# Altium PCB Controlled Rectifier.PcbDoc
Units mm, origin at the board's own origin, x right, y up, seen from the top; angles counter-clockwise.
Board outline 66.5 x 100.84 mm, 2 copper layers (Top Layer, Bottom Layer); 64 components, 39 nets, 239 pads, 0 vias.
Unrouted connection lines stored in the file: 2.
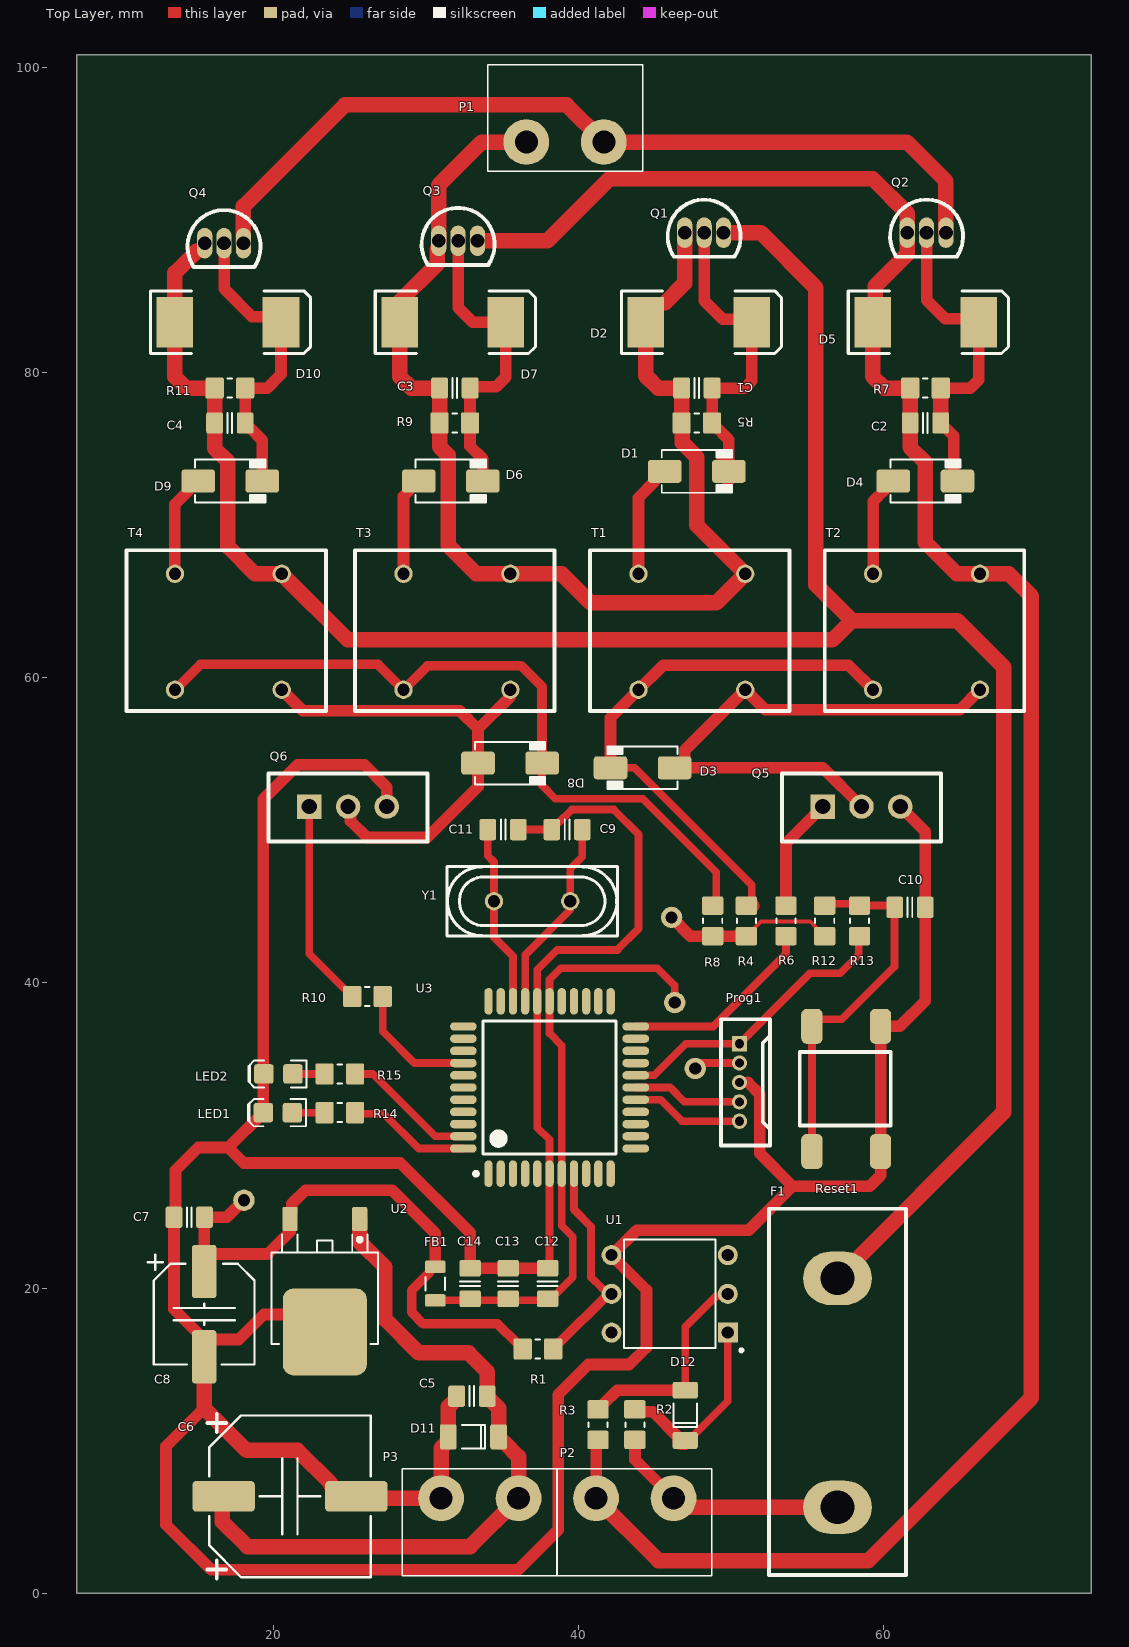
[diagram p0: Top Layer view]
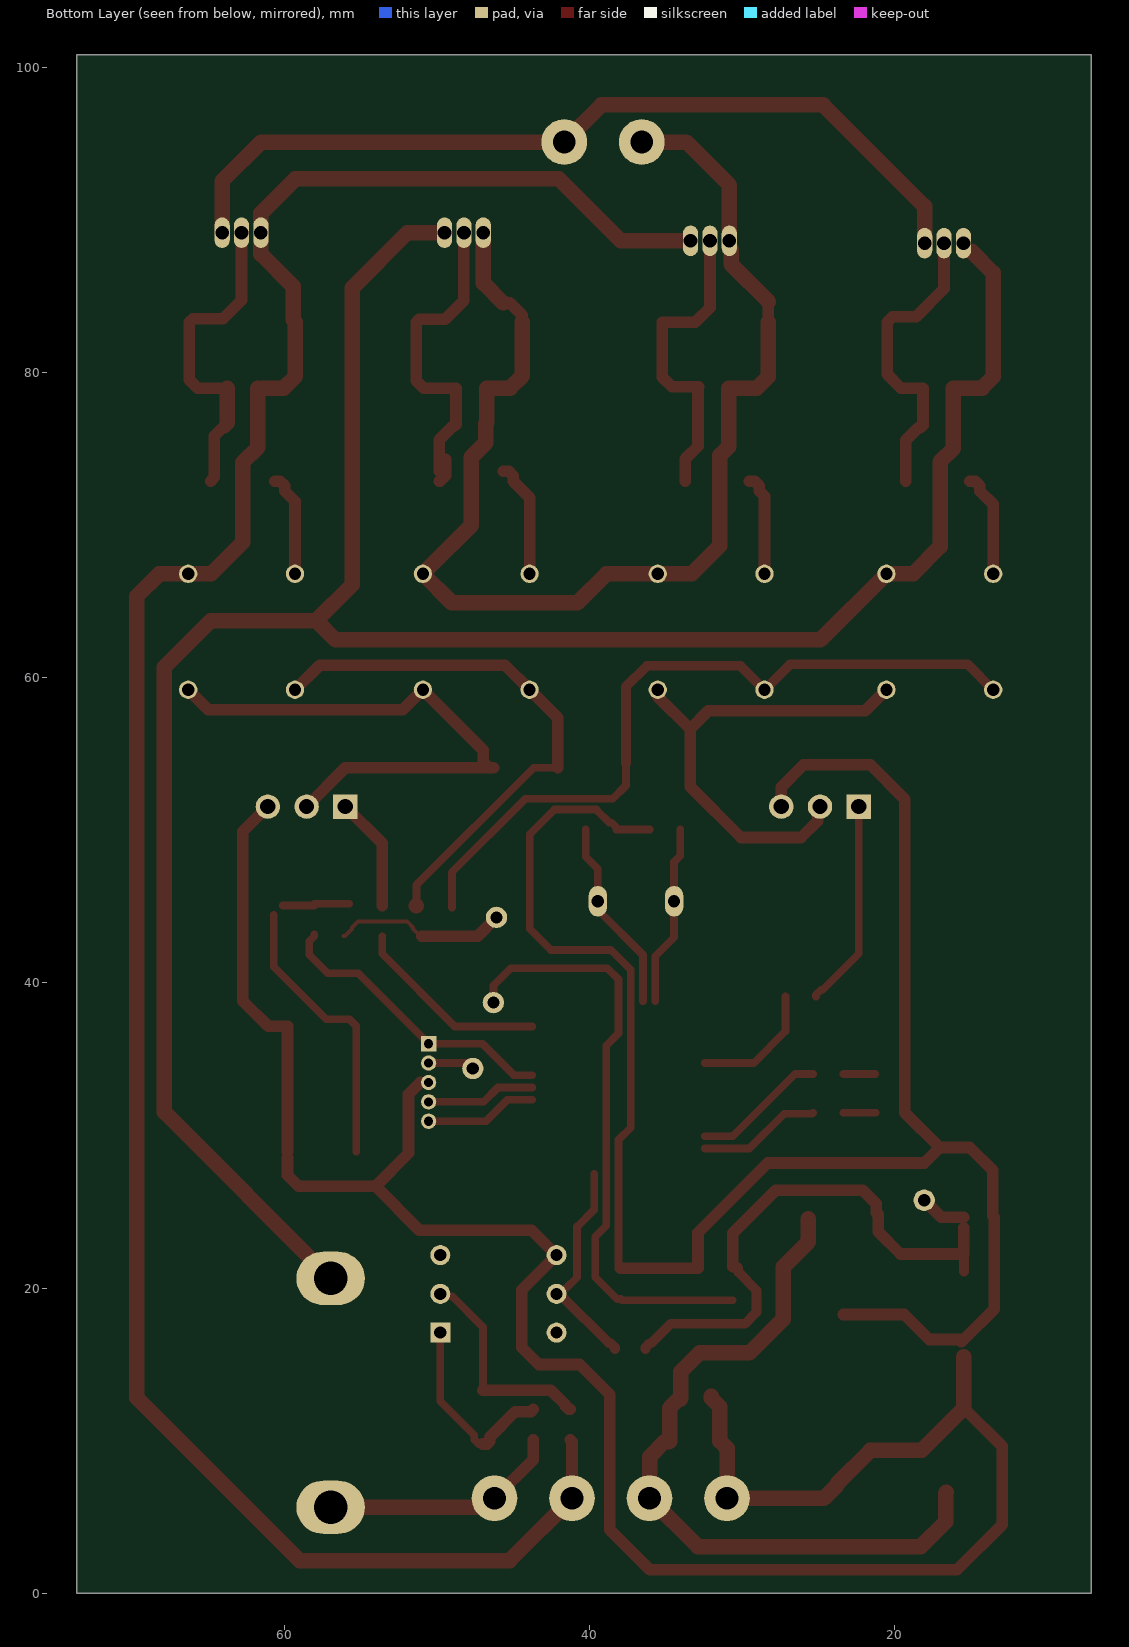
[diagram p1: Bottom Layer view, seen from below]
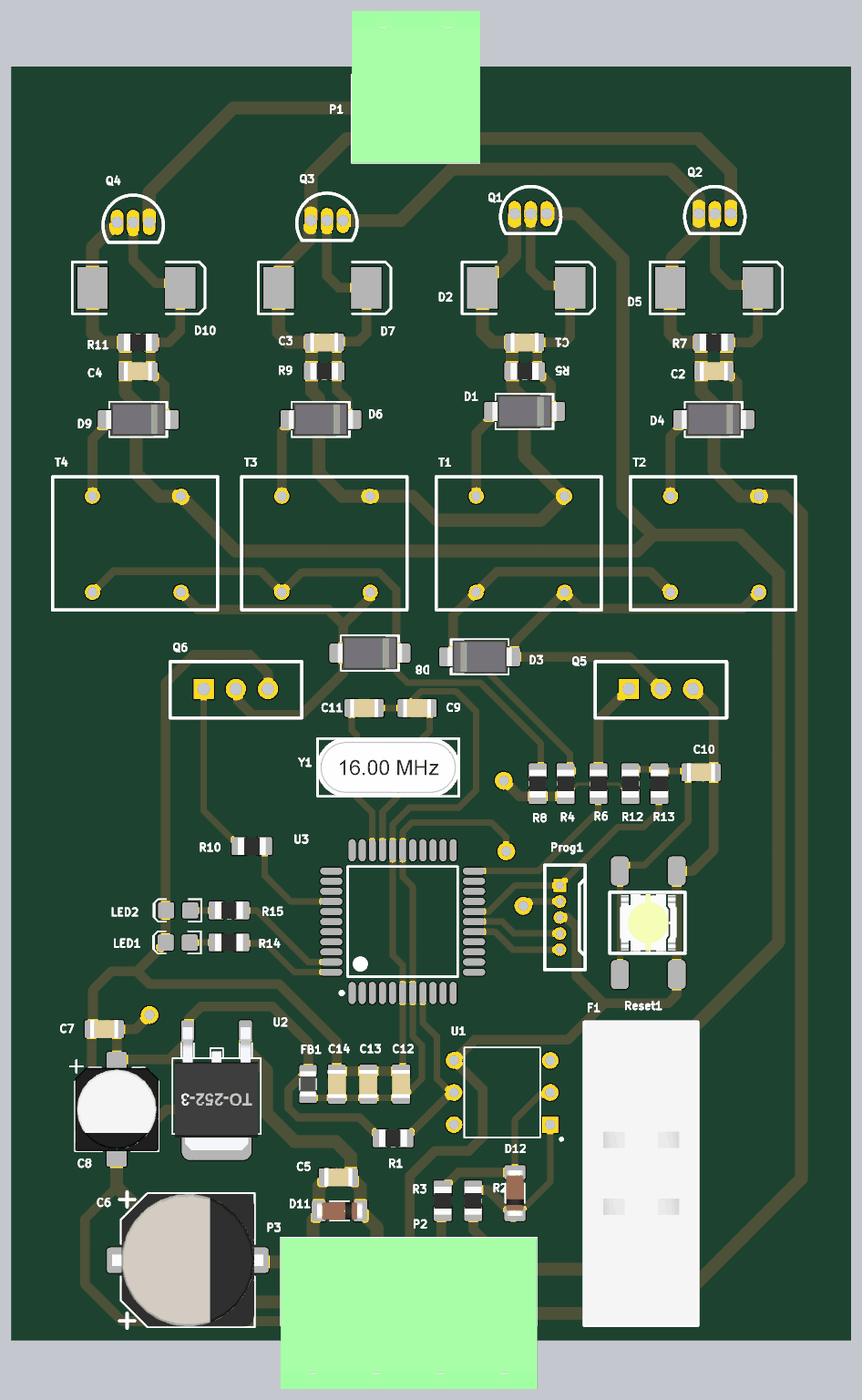
[diagram p2: 3D render of the assembled board from above, using the file's embedded part models]

## Layer stack, top to bottom
Top Solder: solder mask 0.0102, Solder Resist, Dk 3.5
Top Layer: signal copper 0.0356
Dielectric 1: dielectric 0.32, FR-4, Dk 4.8
Bottom Layer: signal copper 0.0356
Bottom Solder: solder mask 0.0102, Solder Resist, Dk 3.5

## Board outline
7.112,0 73.609,0 73.609,100.838 7.112,100.838

## Design rules (kind name [scope] priority, off if disabled: settings)
Clearance [All] p1: gap=0.2 ignorepadtopadclearanceinfootprint=FALSE
ComponentClearance [All] p1: gap=0.127 collisioncheckmode=3 verticalgap=0.127 showdistances=FALSE
HoleSize [All] p1: absolutevalues=TRUE maxlimit=2.54 minlimit=0.4 maxpercent=80.000 minpercent=20.000
PolygonConnect [All] p1: connectstyle=Relief reliefconductorwidth=0.254 reliefentries=4 polygonreliefangle="90 Angle" airgapwidth=0.254
RoutingVias [All] p1: holewidth=0.711 width=1.27 viastyle="Through Hole" minholewidth=0.711 minwidth=1.27 maxholewidth=0.711 maxwidth=1.27
SolderMaskExpansion [All] p1: expansion=0.102
UnRoutedNet [All] p1: checkbadconnections=TRUE
Width [All] p1: maxlimit=1.016 minlimit=0.254 preferedwidth=0.508
27 further rules are at their usual default settings.

## Classes and differential pairs
component class "controlled rectifier": C5 C6 C7 C8 C9 C10 C11 C12 C13 C14 D11 FB1 LED1 LED2 P3 Prog1 R12 R13 R14 R15 Reset1 U2 U3 Y1
component class "controlled rectifier2": C1 C2 C3 C4 D1 D2 D3 D4 D5 D6 D7 D8 D9 D10 D12 F1 P1 P2 Q1 Q2 Q3 Q4 Q5 Q6 R1 R2 R3 R4 R5 R6 R7 R8 R9 R10 R11 T1 T2 T3 T4 U1

## Components (designator, comment, footprint, x,y, rotation, side; value= is the part's Value field where it differs from the comment)
C1 "100nF" CAPS_0805 47.752,78.994 r0 top
C2 "100nF" CAPS_0805 62.738,76.708 r0 top
C3 "100nF" CAPS_0805 31.888,78.994 r0 top
C4 "100nF" CAPS_0805 17.145,76.708 r0 top
C5 "100nF" CAPS_0805 33.008,12.915 r0 top
C6 "100uF.50v" CAP_ELEC_SIZE_G 21.082,6.35 r270 top value=100pF
C7 "100nF" CAPS_0805 14.478,24.638 r0 top
C8 "100uF.16v" CAP_ELEC_6.3x4.2 15.461,18.288 r90 top value=100pF
C9 "22pF" CAPS_0805 39.243,50.053 r0 top value=0.1uF
C10 "100nF" CAPS_0805 61.722,44.958 r0 top
C11 "22pF" CAPS_0805 35.052,50.053 r180 top value=0.1uF
C12 "10uF" CAPS_0805 37.973,20.295 r270 top value=0.1uF
C13 "10nF" CAPS_0805 35.382,20.295 r270 top value=0.1uF
C14 "100nF" CAPS_0805 32.893,20.295 r270 top value=0.1uF
D1 "SS14" DO-214AC 47.752,73.533 r0 top
D2 "SMBJ8.0CA" SMC 47.879,83.312 r0 top
D3 "SS14" DO-214AC 44.196,54.102 r180 top
D4 "SS14" DO-214AC 62.738,72.898 r0 top
D5 "SMBJ8.0CA" SMC 62.755,83.312 r0 top
D6 "SS14" DO-214AC 31.623,72.898 r0 top
D7 "SMBJ8.0CA" SMC 31.75,83.312 r0 top
D8 "SS14" DO-214AC 35.509,54.407 r0 top
D9 "SS14" DO-214AC 17.169,72.898 r0 top
D10 "SMBJ8.0CA" SMC 17.018,83.312 r0 top
D11 "LL4148" "SOD80, LL-34" 33.108,10.248 r180 top
D12 "LL4148" "SOD80, LL-34" 46.99,11.659 r90 top
F1 "Fuse_5A" fuse-2 56.972,13.132 r90 top
FB1 "Ferrite Bead" FBC2012N 30.607,20.295 r270 top value=10mH
LED1 "LED_green" LED-0805-A 20.288,31.496 r180 top
LED2 "LED_blue" LED-0805-A 20.325,34.036 r180 top
P1 "Header 2" "Phoenix 2 Pin -RA" 39.218,93.193 r180 top
P2 "Header 2" "Phoenix 2 Pin -RA" 43.586,8.153 r0 top
P3 "Header 2" "Phoenix 2 Pin -RA" 33.426,8.153 r0 top
Prog1 "Header 5" "SH-5 Pin" 50.546,36.017 r270 top
Q1 "MAC97" BT169 49.505,89.179 r180 top
Q2 "SCR" BT169 64.084,89.179 r180 top
Q3 "SCR" BT169 33.376,88.646 r180 top
Q4 "SCR" BT169 18.034,88.494 r180 top
Q5 "BD139" BD139 56.007,51.562 r0 top
Q6 "BD139" BD139 22.352,51.562 r0 top
R1 "4.7K" res_0805 37.338,16.002 r180 top
R2 "4.7K" res_0805 43.688,11.049 r90 top
R3 "4.7K" res_0805 41.275,11.049 r90 top
R4 "4.7K" res_0805 50.998,44.069 r270 top
R5 "4.7K" res_0805 47.752,76.708 r0 top
R6 "4.7K" res_0805 53.594,44.069 r90 top
R7 "4.7K" res_0805 62.738,78.994 r0 top
R8 "4.7K" res_0805 48.793,44.069 r270 top
R9 "4.7K" res_0805 31.888,76.708 r0 top
R10 "4.7K" res_0805 26.162,39.116 r180 top
R11 "4.7K" res_0805 17.145,78.994 r0 top
R12 "4.7K" RES_0805 56.134,44.069 r90 top
R13 "470" RES_0805 58.42,44.069 r270 top
R14 "470" RES_0805 24.352,31.496 r180 top value=220
R15 "470" RES_0805 24.352,34.036 r180 top value=220
Reset1 "SW-PB-SMD" KFC-6X6X4.5-4P-SMD 57.547,33.058 r0 top
T1 "Pulse Transformator" "Pulse Trans_Small" 43.927,59.218 r0 top
T2 "Pulse Transformator" "Pulse Trans_Small" 59.309,59.218 r0 top
T3 "Pulse Transformator" "Pulse Trans_Small" 28.529,59.218 r0 top
T4 "Pulse Transformator" "Pulse Trans_Small" 13.543,59.218 r0 top
U1 "4N25" DIP762W50P254L712H400Q6N 45.974,19.62 r180 top
U2 "78M05" TO-252 23.368,20.828 r180 top
U3 "PIC16F1937-I/PT" TQFP-PT44_N 38.1,33.147 r90 top
Y1 "NTK-10.000-HC49USM" XTLT_2 36.957,45.354 r0 top

## Footprints (in the part's own frame and the unit in brackets; to place one, negate y for a bottom-side part, rotate by r counter-clockwise, add the part's x,y. Pads: shape width x height; smd on the part's side, far side on the other; paste and mask are expansions set on the pad)
BD139 [mm] "SOT-32"
  round 1.6 hole 1: 1(2.54,0) 3(5.08,0)
  rect 1.6x1.6 hole 1: 2(0,0)
  silkscreen extent -2.67,-2.29 7.75,2.16
BT169 [mm]
  oval 1x2 hole 0.9: 1(0,0) 2(1.27,0) 3(2.54,0)
  silkscreen extent -1.12,-2.16 3.66,1.57
CAP_ELEC_6.3x4.2 [mm] "Capacitor, polarized, aluminum can; 6.3x4.2mm DxH"
  round 0.508 on Mech15: 0(0,0)
  rrect25% 3.5x1.6 smd: 1(2.8,0) 2(-2.8,0)
  silkscreen extent -3.3,-3.3 3.9,3.7, body extent -3.3,-3.3 3.3,3.3, height 4.23
CAP_ELEC_SIZE_G [mm] "Capacitor, polarized, aluminum can; 10.0x10.2mm DxH"
  round 0.635 on Mech15: 0(0,0)
  rrect25% 2x4.1 smd: 1(0,-4.35) 2(0,4.35)
  silkscreen extent -5.4,-5.4 5.4,5.3, body extent -5.25,-6 5.25,6, height 10.5
CAPS_0805 [mm]
  round 0.254 on Mech15: 0(0,0)
  rrect25% 1.1x1.4 smd: 1(-1,0) 2(1,0)
  Top Layer pour cut-out: -0.675,0.7 -0.475,0.9 0.475,0.9 0.675,0.7 0.675,-0.7 0.475,-0.9 -0.475,-0.9 -0.675,-0.7
  silkscreen extent -0.15,-0.65 0.15,0.65, body extent -1.1,-0.72 1.1,0.73, height 1.34
DIP762W50P254L712H400Q6N [mm]
  rect 1.308x1.308 hole 0.8: 1(-3.81,2.54)
  round 1.308 hole 0.8: 2(-3.81,0) 3(-3.81,-2.54) 4(3.81,-2.54) 5(3.81,0) 6(3.81,2.54)
  silkscreen extent -4.8,-3.56 3,3.8
DO-214AC [mm]
  round 0.508 on Mech15: 0(0,0)
  rrect25% 2.2x1.5 smd: 1(-2.1,0) 2(2.1,0)
  silkscreen extent -2.3,-1.4 2.3,1.4, body extent -2.6,-1.3 2.6,1.3, height 2.42
FBC2012N [mm] "Ferrite Bead Chip, Body 2.0x1.2mm, 0805, IPC Medium Density"
  round 0.508 on Mech15: 0(0,0)
  rrect25% 0.8x1.35 smd: 1(-1.1,0) 2(1.1,0)
  silkscreen extent -0.43,-0.64 0.46,0.64, body extent -1,-0.62 1,0.63, height 0.9
fuse-2 [mm]
  oval 3.5x4.5 hole 2.2: 1(-7.5,0) 2(7.5,0)
  silkscreen extent -11.94,-4.5 12.06,4.5, body extent -11.9,-4.52 12.1,4.56, height 12.96
KFC-6X6X4.5-4P-SMD [mm]
  rrect50% 1.4x2.3 smd: 1(2.25,-4.1) 1(2.25,4.1) 2(-2.25,-4.1) 2(-2.25,4.1)
  silkscreen extent -3.05,-2.41 2.92,2.41, body extent -2.25,-2.25 2.25,2.25, height 0.55
LED-0805-A [mil]
  round 20 on Mech15: 0(0,0)
  rrect25% 50x50 smd: 1(-37.5,0) 2(37.5,0)
  Top Layer pour cut-out: -15,30 15,30 15,-30 -15,-30
  silkscreen extent -72,-35 77,35, body extent -39,-25 39,25, height 31
"Phoenix 2 Pin -RA" [mm]
  round 3 hole 1.5: 1(2.642,-1.93) 2(-2.438,-1.93)
  silkscreen extent -4.98,-7 5.16,0, body extent -5,-12.02 5.16,-0.02, height 8.6
"Pulse Trans_Small" [mm]
  round 1.2 hole 0.8: 1(0,0) 2(7,0) 3(0,7.6) 4(7,7.6)
  silkscreen extent -3.17,-1.4 9.91,9.14
res_0805 [mm]
  round 0.254 on Mech15: 0(0,0)
  rrect20% 1.2x1.4 smd: 1(-1,0) 2(1,0)
  Top Layer pour cut-out: -0.725,0.65 -0.525,0.85 0.525,0.85 0.725,0.65 0.725,-0.65 0.525,-0.85 -0.525,-0.85 -0.725,-0.65
  silkscreen extent -0.15,-0.62 0.15,0.62, body extent -1.1,-0.67 1.1,0.68, height 0.69
RES_0805 [mm]
  round 0.254 on Mech15: 0(0,0)
  rrect20% 1.2x1.4 smd: 1(-1,0) 2(1,0)
  Top Layer pour cut-out: -0.725,0.65 -0.525,0.85 0.525,0.85 0.725,0.65 0.725,-0.65 0.525,-0.85 -0.525,-0.85 -0.725,-0.65
  silkscreen extent -0.15,-0.62 0.15,0.62, body extent -1.1,-0.67 1.1,0.68, height 0.69
"SH-5 Pin" [mm]
  rect 1x1 hole 0.6: 1(0,0)
  round 1 hole 0.6: 2(1.27,0) 3(2.54,0) 4(3.81,0) 5(5.08,0)
  silkscreen extent -1.6,-1.2 6.68,2, body extent -1.6,-1.2 6.68,2, height 4.9
SMC [mm] "DO-214-AB/SMC; 2 C-Bend Leads; Body 7.9 x 5.9 mm, inc. leads (LxW)"
  rect 2.4x3.3 smd: 1(-3.475,0) 2(3.475,0)
  silkscreen extent -5.08,-2.05 5.42,2.06
"SOD80, LL-34" [mm]
  round 0.5 on Mech15: 0(0,0)
  rrect25% 1.1x1.65 smd: 1(1.65,0) 2(-1.65,0)
  silkscreen extent -0.76,-0.76 0.76,0.76, body extent -1.8,-0.75 1.8,0.75, height 1.47
TO-252 [mm]
  round 0.5 on Mech15: 0(0,0)
  rrect25% 1x1.6 smd: 1(-2.285,-3.7) 3(2.285,-3.7)
  rrect25% 5.5x5.7 smd: 4(0,3.7)
  silkscreen extent -3.5,-2.7 3.5,4.5, body extent -3.3,-3.95 3.3,5.76, height 2.31
TQFP-PT44_N [mm] "Thin QFP, 44-Leads, Body 10x10mm, Pitch 0.8mm, IPC Medium Density"
  oval 1.75x0.55 smd: 1(-5.65,4) 2(-5.65,3.2) 3(-5.65,2.4) 4(-5.65,1.6) 5(-5.65,0.8) 6(-5.65,0) 7(-5.65,-0.8) 8(-5.65,-1.6) 9(-5.65,-2.4) 10(-5.65,-3.2) 11(-5.65,-4) 23(5.65,-4) 24(5.65,-3.2) 25(5.65,-2.4) 26(5.65,-1.6) 27(5.65,-0.8) 28(5.65,0) 29(5.65,0.8) 30(5.65,1.6) 31(5.65,2.4) 32(5.65,3.2) 33(5.65,4)
  oval 0.55x1.75 smd: 12(-4,-5.65) 13(-3.2,-5.65) 14(-2.4,-5.65) 15(-1.6,-5.65) 16(-0.8,-5.65) 17(0,-5.65) 18(0.8,-5.65) 19(1.6,-5.65) 20(2.4,-5.65) 21(3.2,-5.65) 22(4,-5.65) 34(4,5.65) 35(3.2,5.65) 36(2.4,5.65) 37(1.6,5.65) 38(0.8,5.65) 39(0,5.65) 40(-0.8,5.65) 41(-1.6,5.65) 42(-2.4,5.65) 43(-3.2,5.65) 44(-4,5.65)
  silkscreen extent -5.77,-4.35 4.35,4.95, body extent -5,-5 5,5, height 1.2
XTLT_2 [mm]
  round 1.2 / inner oval 1.2x2 / far side oval 1.2x2 hole 0.8: 1(-2.5,0)
  round 1.2 / inner round 1.2 / far side oval 1.2x2 hole 0.8: 2(2.5,0)
  silkscreen extent -5.59,-2.29 5.59,2.29, body extent -5.67,-2.32 5.67,2.33, height 3.6

## Part data
C1 C2 C3 C4 C5 C7: library part "CAP SMD 0805", "CAP 0805", Data=16-12-2016, Desc.="CAP SMD 0805", Designer="Abbas Basereh"
C6 C8: library part Cap2, "Capacitor", PackageDescription="Capacitor; 2 Leads", PackageReference=CAPR5-4X5, Published=23-Sep-2002, Publisher="Altium Limited"
C9 C10 C11 C12 C13 C14: library part Cap, "Capacitor", LatestRevisionDate=17-Jul-2002, LatestRevisionNote="Re-released for DXP Platform.", PackageDescription="Radial Cap, Thru-Hole; 2 Leads; 0.3 in Pin Spacing", PackageReference=RAD-0.3, Published=8-Jun-2000, Publisher="Altium Limited"
D1 D2 D3 D4 D5 D6 D7 D8 D9 D10 D11 D12: library part Diode, "Default Diode", Code_JEDEC=DO-214-AB, LatestRevisionDate=17-Jul-2002, LatestRevisionNote="Re-released for DXP Platform.", PackageDescription="DO-214-AB/SMC; 2 C-Bend Leads; Body 7.9 x 5.9 mm, inc. leads (LxW)", PackageReference=SMC, PackageVersion=Sep-1996, Published=8-Jun-2000, Publisher="Altium Limited"
F1: library part "Fuse 2", "Fuse", LatestRevisionDate=17-Jul-2002, LatestRevisionNote="Re-released for DXP Platform.", PackageDescription="Thru-Hole; 2 Leads", PackageReference=PIN-W2/E2.8, Published=8-Jun-2000, Publisher="Altium Limited"
FB1: library part "Inductor Iron", "Magnetic-Core Inductor", LatestRevisionDate=17-Jul-2002, LatestRevisionNote="Re-released for DXP Platform.", PackageDescription="Axial Device, Thru-Hole; 2 Leads; 0.9 in Pin Spacing", PackageReference=AXIAL-0.9, Published=24-Mar-1999, Publisher="Altium Limited"
LED1 LED2: library part LED2, "Typical RED, GREEN, YELLOW, AMBER GaAs LED", LatestRevisionDate=17-Jul-2002, LatestRevisionNote="Re-released for DXP Platform.", PackageDescription="SM LED; 2 Flat Leads", PackageReference=3.2X1.6X1.1, PackageVersion=Feb-2002, Published=8-Jun-2000, Publisher="Altium Limited"
P1 P2 P3: "Header, 2-Pin", LatestRevisionDate=17-Jul-2002, LatestRevisionNote="Re-released for DXP Platform.", Publisher="Altium Limited"
Prog1: "Header, 5-Pin", LatestRevisionDate=17-Jul-2002, LatestRevisionNote="Re-released for DXP Platform.", Publisher="Altium Limited"
Q1: library part SCR, "Silicon Controlled Rectifier", Code_JEDEC=TO-220-AB, LatestRevisionDate=17-Jul-2002, LatestRevisionNote="Re-released for DXP Platform.", PackageReference=TO-220-AB, Published=8-Jun-2000, Publisher="Altium Limited"
Q2 Q3 Q4: "Silicon Controlled Rectifier", Code_JEDEC=TO-220-AB, LatestRevisionDate=17-Jul-2002, LatestRevisionNote="Re-released for DXP Platform.", PackageReference=TO-220-AB, Published=8-Jun-2000, Publisher="Altium Limited"
Q5 Q6: library part NPN, "NPN Bipolar Transistor", Code_JEDEC=TO-226-AA, LatestRevisionDate=17-Jul-2002, LatestRevisionNote="Re-released for DXP Platform.", PackageDescription="TO, Flat Index; 3 In-Line, Axial Leads; Body Dia. 4.8mm; Leads 0.55 x 0.51 mm (max)", PackageReference=TO-226-AA, Published=8-Jun-2000, Publisher="Altium Limited"
R1 R2 R3 R4 R5 R6 R7 R8 R9 R10 R11 R12 R13 R14 R15: library part Res2, "Resistor", LatestRevisionDate=17-Jul-2002, LatestRevisionNote="Re-released for DXP Platform.", PackageDescription="Axial Device, Thru-Hole; 2 Leads; 0.4 in Pin Spacing", PackageReference=AXIAL-0.4, Published=8-Jun-2000, Publisher="Altium Limited"
Reset1: library part SW-PB, "Switch", LatestRevisionDate=17-Jul-2002, LatestRevisionNote="Re-released for DXP Platform.", PackageDescription="Switch; 2 Leads", PackageReference=SPST-2, Published=24-Mar-1999, Publisher="Altium Limited"
T1 T2 T3 T4: library part Trans, "Transformer", LatestRevisionDate=08-Jul-2005, LatestRevisionNote="Mech Layer 1 removed.", PackageDescription="Transformer; 4 Leads", PackageReference=TRANS, Published=24-Mar-1999, Publisher="Altium Limited"
U1: "Optoisolator Transistor with Base Output 5000Vrms 1 Channel 6-DIP", Package="DIP-6 Lite-On", Availability=Unavailable, MF="Vishay Semiconductor", MP=4N25, Price=None, SnapEDA_Link=https://www.snapeda.com/parts/4N25/Vishay%20Semiconductor%20Opto%20Division/view-part/641454/?ref=snap
U2: library part µA78M05CKTPR, "Positive-Voltage Regulator", Code_JEDEC=TO-252, ComponentLink1Description="Manufacturer Link", ComponentLink1URL=http://www.ti.com/, ComponentLink2Description=Datasheet, ComponentLink2URL=http://www-s.ti.com/sc/ds/ua78m05.pdf, DatasheetVersion=Jul-1999, Note="Pin 2 is electrically connected to pin4, and not drawn.", PackageDescription="PowerFLEX (D-PAK/TO-252-AA); 3 Leads (1 Cropped); Body 9.7 (inc. leads) x 6.2 mm (LxW max)", PackageReference=KTP02, PackageVersion=Jan-2001, Published=15-Apr-2002, Publisher="Altium Limited"
U3: "CMOS Microcontroller with LCD Driver, 8K (words) Program Memory, 256 Bytes Data Memory, 512 Bytes SRAM, 36 I/O's, 1.8V-5.5V, 44-Pin TQFP, Industrial Temperature, Tray", Manufacturer=Microchip, Supplier Part Number 1=PIC16F1937-I/PT-ND, Code_JEDEC=MS-026, ComponentLink1Description="Manufacturer URL", ComponentLink1URL=http://www.microchip.com/, ComponentLink2Description=Datasheet, ComponentLink2URL=http://ww1.microchip.com/downloads/en/DeviceDoc/41364E.pdf, DatasheetVersion="revE, May-2011", PackageDescription="44-Lead Plastic Thin Quad Flatpack (PT) - 10x10x1mm Body, 2.00mm [TQFP]", PackageReference=TQFP-PT44, PackageVersion="revBB, Aug-2009", PartNumber=PIC16F1937-I/PT, Supplier 1=Digi-Key, Supplier 2=Farnell, Supplier 3=Farnell, Supplier 4=Newark, Supplier 5=Mouser, Supplier Part Number 2=1755826, Supplier Part Number 3=1755826MPKG, Supplier Part Number 4=45P4775, Supplier Part Number 5=579-PIC16F1937-I/PT
Y1: library part XTAL, "Crystal Oscillator", LatestRevisionDate=17-Jul-2002, LatestRevisionNote="Re-released for DXP Platform.", PackageDescription="Crystal, Thru-Hole; 2 Leads; Body 3.1 x 8.2 mm (Dia.xH)", PackageReference=R38, Published=8-Jun-2000, Publisher="Altium Limited"

## Free pads (board coordinates)
  round 1.4 hole 0.8: 5(18.065,25.756) 6(46.101,44.298) 9(46.304,38.71) 11(47.65,34.392)

## Nets (pads, with @x,y where several pads share a name; then routed paths per layer and width w, separated by ;. In a path a pad name is that pad's centre, name@x,y a point inside that pad or via, vN(x,y) a via of type N, cw(c..) or ccw(c..) an arc to the next point about the centre after c; other vN are vias at no path point)
Base_Jmp: U1.6
GND: C5.1 C6.2 C7.1 C8.2 C9.1 C10.2 C11.1 C12.1 C13.1 C14.1 D11.1 LED1.2 LED2.2 P3.2 Prog1.3 Q5.3 Q6.3 Reset1.1 U1.4 U2.4 U3.6 U3.29 | length 271.5
  Top Layer w0.508: C11.1 C9.1 38.243,50.203 38.539,50.499 38.689,50.499 39.552,51.362 42.317,51.362 43.927,49.752 43.927,43.546 42.545,42.164 38.608,42.164 37.3,40.856 U3.29 37.3,30.519 38.1,29.719 U3.6 38.1,21.422 C12.1 ; Prog1.3 51.105,33.477 ; Reset1.1@59.797,28.56 Reset1.1@59.797,28.958
  Top Layer w0.762: 15.461,12.135 12.954,9.628 12.954,4.485 15.915,1.524 36.051,1.524 38.673,4.146 38.673,13.019 40.64,14.986 43.331,14.986 44.45,16.105 44.45,19.874 U1.4 43.804,23.8 51.156,23.8 54.026,26.67 ; C8.2@15.621,16.471 C8.2@15.461,16.631 ; U2.4@23.368,18.271 19.363,18.271 17.723,16.631 C8.2@15.461,16.631 ; Q6.3 27.432,52.832 25.973,54.291 21.588,54.291 19.335,52.039 LED1.2 17.049,29.21 ; C12.1 C13.1 C14.1 32.893,23.624 28.323,28.194 18.065,28.194 17.049,29.21 ; 51.105,33.477 51.867,32.715 51.867,28.829 54.026,26.67 ; Reset1.1@59.797,28.56 59.797,27.387 59.08,26.67 54.026,26.67 ; Reset1.1@59.797,28.958 59.797,37.158 61.059,37.158 62.722,38.821 C10.2 62.722,49.927 Q5.3 ; C8.2@15.461,16.631 13.478,18.614 C7.1 13.576,24.736 13.576,27.717 15.07,29.21 17.049,29.21
  Top Layer w1.016: C8.2 15.461,12.135 18.237,9.359 21.59,9.359 23.763,7.186 23.763,7.096 24.636,6.223 P3.2 30.988,9.502 31.458,9.973 D11.1 31.458,12.215 32.008,12.765 C5.1
LED_Blue: R15.1 U3.43 | length 8.8
  Top Layer w0.508: R15.1 26.518,34.036 30.607,29.947 U3.43
LED_Green: R14.1 U3.44 | length 8.1
  Top Layer w0.508: R14.1 25.415,31.433 27.241,31.433 29.527,29.147 U3.44
Load_N: P1.2 Q2.1 Q4.1 | length 56.7
  Top Layer w1.016: Q4.1 18.034,90.907 24.689,97.561 39.218,97.561 P1.2 61.519,95.123 64.084,92.558 Q2.1
Load_P: C1.1 C3.1 D2.1 D7.1 P1.1 Q1.3 Q3.3 R5.1 R9.1 T1.4 T3.4 | length 83.1
  Top Layer w0.762: D7.1 D7.1@28.275,84.663 ; Q3.3@30.726,88.1 30.836,88.21 Q3.3 ; D2.1 44.404,83.762 45.223,84.581 45.673,84.581 ; R5.1 R5.1@46.804,76.656
  Top Layer w1.016: D7.1 28.275,79.751 29.032,78.994 C3.1 R9.1 30.888,75.151 31.458,74.581 31.458,68.668 33.309,66.818 T3.4 38.897,66.818 40.792,64.922 49.031,64.922 T1.4 50.427,67.318 47.752,69.993 47.752,74.46 46.804,75.408 R5.1@46.804,76.656 ; D7.1@28.275,84.663 30.726,87.114 Q3.3@30.726,88.1 ; Q3.3 30.836,92.304 33.655,95.123 P1.1 ; D2.1 44.404,79.802 45.212,78.994 C1.1 R5.1 ; 45.673,84.581 46.965,85.873 Q1.3
MCLR: Prog1.1 R13.2 U3.18 | length 19.4
  Top Layer w0.508: U3.18 44.95,33.947 47.02,36.017 Prog1.1 55.169,40.64 57.15,40.64 58.369,41.859 58.369,42.739 58.039,43.069 R13.2@58.039,43.196
NetC10_1: C10.1 R12.2 R13.1 Reset1.2 | length 23
  Top Layer w0.508: Reset1.2@55.297,28.958 55.297,37.158 55.297,37.176 55.736,37.615 57.258,37.615 60.706,41.063 C10.1@60.706,44.466 ; R12.2@55.753,45.196 R13.1@58.039,45.196 ; R13.1@58.039,45.069 60.103,45.069
NetD1_1: D1.1 T1.3 | length 7.6
  Top Layer w0.762: T1.3 43.927,71.808 45.002,72.883 45.002,73.233 45.302,73.533 D1.1
NetD3_1: D3.1 Q5.1 T1.2 T2.2 | length 36.7
  Top Layer w0.762: D3.1 D3.1@46.601,54.102 ; Q5.1 56.007,54.102 D3.1@46.601,54.102 ; T2.2 65.003,57.912 52.233,57.912 T1.2 46.97,55.261 46.97,54.471 D3.1@46.601,54.102
NetD3_2: D3.2 R4.1 T1.1 T2.1 | length 36.4
  Top Layer w0.508: D3.2 43.664,54.102 51.349,46.417 R4.1@51.349,45.074
  Top Layer w0.762: D3.2 42.096,57.387 T1.1 45.542,60.833 57.694,60.833 T2.1
  Top Layer w1.016: R4.1@51.349,45.074 R4.1@51.354,45.069
NetD4_1: D4.1 T2.3 | length 6.8
  Top Layer w0.762: T2.3@59.373,66.882 59.309,66.945 59.309,71.569 59.988,72.248 59.988,72.598 60.288,72.898 D4.1
NetD6_1: D6.1 T3.3 | length 6.7
  Top Layer w0.762: T3.3 28.529,71.904 28.873,72.248 28.873,72.598 29.173,72.898 D6.1
NetD8_1: D8.1 Q6.1 T3.2 T4.2 | length 32.4
  Top Layer w0.762: T4.2 21.925,57.836 32.215,57.836 33.409,56.642 ; Q6.1 25.052,51.402 25.052,50.617 26.139,49.53 30.073,49.53 33.409,52.866 D8.1 33.409,56.642 ; T3.2 35.529,58.762 33.409,56.642
NetD8_2: D8.2 R8.1 T3.1 T4.1 | length 49.2
  Top Layer w0.508: D8.2 37.609,52.942 38.481,52.07 44.196,52.07 49.022,47.244 R8.1@49.022,44.942
  Top Layer w0.635: T4.1 15.209,60.884 26.863,60.884 T3.1 30.093,60.782 36.246,60.782 37.609,59.419 D8.2
NetD9_1: D9.1 T4.3 | length 6.9
  Top Layer w0.762: T4.3 13.543,71.372 14.419,72.248 14.419,72.598 14.719,72.898 D9.1
NetD12_1: D12.1 R3.2 U1.2 | length 14.1
  Top Layer w0.508: D12.1 46.99,17.45 49.007,19.467 49.631,19.467 U1.2
  Top Layer w0.762: R3.2 41.375,12.049 41.594,12.268 41.594,12.368 42.535,13.309 D12.1
NetD12_2: D12.2 R2.2 U1.1 | length 13
  Top Layer w0.508: D12.2@46.99,9.78 47.265,9.78 47.561,10.076 47.561,10.351 49.784,12.574 U1.1
  Top Layer w0.762: R2.2 43.833,11.904 44.866,11.904 46.546,10.224 46.546,9.949 46.715,9.78 D12.2@46.99,9.78
NetLED1_1: LED1.1 R14.2 | length 2.1
  Top Layer w0.508: LED1.1 R14.2
NetLED2_1: LED2.1 R15.2 | length 2.1
  Top Layer w0.508: LED2.1 R15.2
NetQ5_2: Q5.2 R6.2 | length 7.5
  Top Layer w0.762: R6.2 53.594,49.149 Q5.2
NetQ6_2: Q6.2 R10.2 | length 13.7
  Top Layer w0.508: Q6.2 22.352,41.926 24.716,39.562 24.816,39.562 25.162,39.216 R10.2
Nole: C2.1 D5.1 P2.2 Q2.3 Q3.1 R3.1 R7.1 T2.4 | length 154.9
  Top Layer w0.762: P2.2 41.148,9.922 R3.1
  Top Layer w1.016: Q3.1 37.951,88.646 42.015,92.71 59.289,92.71 61.544,90.455 Q2.3 61.544,87.774 59.436,85.666 59.436,83.468 D5.1 59.28,79.76 60.046,78.994 R7.1@61.443,78.994 ; P2.2 45.237,2.134 59.004,2.134 69.672,12.802 69.672,65.354 68.208,66.818 T2.4 64.803,66.818 62.738,68.883 62.738,74.108 61.738,75.108 C2.1 R7.1
OSC1: C9.2 U3.30 Y1.2 | length 12.8
  Top Layer w0.508: U3.30 36.5,41.834 39.457,44.791 Y1.2 39.457,47.491 40.243,48.277 C9.2
OSC2: C11.2 U3.31 Y1.1 | length 11.9
  Top Layer w0.508: C11.2 34.052,48.331 34.457,47.926 Y1.1 34.457,42.997 35.7,41.754 U3.31
PGC: Prog1.5 U3.16 | length 7.4
  Top Layer w0.508: U3.16 45.377,32.347 46.787,30.937 Prog1.5
PGD: Prog1.4 U3.17 | length 7.2
  Top Layer w0.508: U3.17 45.999,33.147 46.939,32.207 Prog1.4
Phase: F1.1 P2.1 R2.1 | length 15.9
  Top Layer w0.762: R2.1 43.699,10.038 43.699,8.752 P2.1
  Top Layer w1.016: P2.1 46.765,6.223 47.356,5.632 F1.1
thy1_G: C1.2 D1.2 D2.2 Q1.2 R5.2 | length 22.4
  Top Layer w0.762: Q1.2 48.235,84.724 49.457,83.502 51.164,83.502 D2.2 51.354,79.472 50.876,78.994 C1.2 R5.2 48.752,76.608 48.844,76.516 48.944,76.516 49.852,75.608 D1.2 ; 49.435,74.314 49.435,73.267 49.804,72.898 D1.2@49.852,72.898
thy2_G: C2.2 D4.2 D5.2 Q2.2 R7.2 | length 21.6
  Top Layer w0.762: Q2.2 62.814,84.759 64.028,83.545 65.997,83.545 D5.2 66.23,79.54 65.684,78.994 R7.2 ; C2.2 63.738,76.558 63.907,76.389 64.057,76.389 64.593,75.853 64.593,73.143 D4.2
  Top Layer w1.016: C2.2 R7.2
thy3_G: C3.2 D6.2 D7.2 Q3.2 R9.2 | length 20.6
  Top Layer w0.762: Q3.2 32.106,84.269 33.063,83.312 D7.2 35.225,79.7 34.595,79.07 C3.2@32.842,79.07 ; C3.2 R9.2 32.888,75.189 33.723,74.354 D6.2
thy4_G: C4.2 D9.2 D10.2 Q4.2 R11.2 | length 20.4
  Top Layer w0.762: Q4.2 16.764,85.496 18.596,83.664 20.141,83.664 D10.2 20.493,79.904 19.583,78.994 R11.2 C4.2 18.145,76.558 18.314,76.389 18.464,76.389 19.269,75.584 D9.2
thy4_K: C4.1 D10.1 F1.2 Q1.1 Q4.3 R11.1 T4.4 | length 153.6
  Top Layer w0.762: 14.948,87.948 15.384,87.948 15.494,88.058 Q4.3
  Top Layer w1.016: 14.948,87.948 13.543,86.543 D10.1 13.543,79.726 14.275,78.994 R11.1 C4.1 16.145,75.041 17.018,74.168 17.018,68.596 18.796,66.818 T4.4 24.877,62.484 56.642,62.484 57.912,63.754 ; Q1.1 51.943,89.179 55.55,85.573 55.55,66.116 57.912,63.754 ; F1.2 67.869,31.528 67.869,60.706 64.821,63.754 57.912,63.754
thy12: R6.1 U3.22 | length 13
  Top Layer w0.508: U3.22 48.831,37.147 53.594,41.91 R6.1
thy34: R10.1 U3.37 | length 8.4
  Top Layer w0.508: R10.1 27.162,36.83 29.245,34.747 U3.37
VCC5V: C7.2 C8.1 FB1.1 pad.5 pad.6 R1.2 R4.2 R8.2 R12.1 U2.3 | length 50.7
  Top Layer w0.254: R4.2 51.098,43.069 51.571,43.542 51.571,43.642 51.948,44.018 55.185,44.018 55.561,43.642 55.561,43.542 56.034,43.069 R12.1
  Top Layer w0.635: C8.1 C8.1@15.461,22.231 ; FB1.1 30.332,21.395 30.25,21.312 30.25,21.037 29.058,19.845 29.058,18.415 29.82,17.653 34.687,17.653 35.955,16.385 36.056,16.385 36.338,16.102 R1.2
  Top Layer w0.762: C7.2@15.461,23.963 15.461,22.231 19.615,22.231 21.083,23.699 U2.3 21.083,24.828 21.202,24.947 21.202,25.52 22.098,26.416 27.784,26.416 30.607,23.593 FB1.1 ; C7.2 16.948,24.638 pad.5 ; pad.6 47.33,43.069 R8.2 R4.2
VCC12V: C5.2 C6.1 D11.2 P3.1 U2.1 | length 48.1
  Top Layer w1.016: C6.1@16.605,6.604 16.661,6.548 16.661,4.675 18.288,3.048 32.893,3.048 P3.1 36.068,8.938 35.075,9.931 34.8,9.931 34.758,9.973 D11.2 34.758,12.128 34.163,12.723 34.05,12.723 34.008,12.765 C5.2 34.008,14.527 32.787,15.748 29.526,15.748 27.305,17.969 27.305,21.387 25.653,23.039 U2.1
VCCMICRO: C12.2 C13.2 C14.2 FB1.2 pad.9 pad.11 Prog1.2 U3.7 U3.28 | length 42.7
  Top Layer w0.508: FB1.2 37.873,19.195 C12.2 ; C12.2@38.176,19.269 39.624,20.717 39.624,23.368 38.9,24.092 U3.7 38.9,35.891 38.1,36.691 U3.28 38.1,40.234 38.837,40.97 45.161,40.97 46.304,39.827 pad.9 ; pad.11 48.006,34.747 Prog1.2
ZCD: R1.1 U1.5 U3.8 | length 14.2
  Top Layer w0.508: U3.8 39.7,25.146 40.818,24.028 40.818,20.708 41.542,19.984 41.583,19.984 42.035,19.532 U1.5@42.035,19.491
  Top Layer w0.635: R1.1 38.338,16.102 38.62,16.385 38.721,16.385 41.827,19.491 U1.5@42.035,19.491
pads on no net: C1.0 C2.0 C3.0 C4.0 C5.0 C6.0 C7.0 C8.0 C9.0 C10.0 C11.0 C12.0 C13.0 C14.0 D1.0 D3.0 D4.0 D6.0 D8.0 D9.0 D11.0 D12.0 FB1.0 LED1.0 LED2.0 R1.0 R2.0 R3.0 R4.0 R5.0 R6.0 R7.0 R8.0 R9.0 R10.0 R11.0 R12.0 R13.0 R14.0 R15.0 U1.3 U2.0 U3.1 U3.2 U3.3 U3.4 U3.5 U3.9 U3.10 U3.11 U3.12 U3.13 U3.14 U3.15 U3.19 U3.20 U3.21 U3.23 U3.24 U3.25 U3.26 U3.27 U3.32 U3.33 U3.34 U3.35 U3.36 U3.38 U3.39 U3.40 U3.41 U3.42